# EAGLE board ai_breakout_ft2323RL (EAGLE 6.5.0)
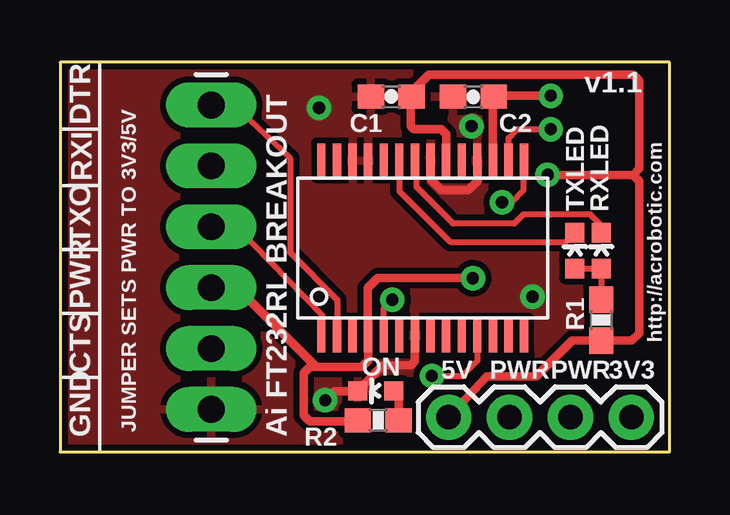
[diagram p0: board, top side]
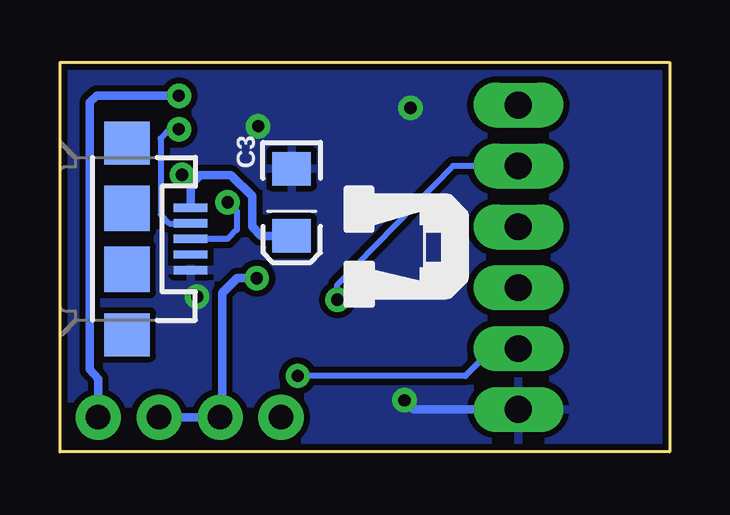
[diagram p1: board, bottom side, seen from below]

Size 25.4 x 16.26 mm. Coordinates in mm from the lower left corner, seen from the top.
Outline: 0,0 25.4,0 25.4,16.26 0,16.26 0,0
Copper layers (1*16): Top 0.035mm / dielectric 1.5mm / Bottom 0.035mm
Design rules "ai_2layer": minimum track width 7mil, minimum drill 15mil, track to track 8mil, track to pad 8mil, pad to pad 8mil, via to via 8mil, smd to smd 8mil, copper to edge 8mil, drill to drill 8mil, minimum pad ring 12mil, minimum via ring 10mil, stop-mask expansion 4mil, vias tented up to drill 20mil, thermal gap 10mil
Net classes: 0 default: width 0.254 mm; 1 power: width 0.356 mm

## Footprints (pad centres in the part's own frame; a part is rotated, then mirrored left to right if it is on the bottom)
CAP-0603 = smd 1.1 x 1: 1 -0.85,0; 2 0.85,0
CAP-POL-EIA3216 = smd 1.4 x 1.6: A 1.4,0; C -1.4,0
SSOP28-LD = smd 0.348 x 1.397: 1 -4.225,-3.656; 2 -3.575,-3.656; 3 -2.925,-3.656; 4 -2.275,-3.656; 5 -1.625,-3.656; 6 -0.975,-3.656; 7 -0.325,-3.656; 8 0.325,-3.656; 9 0.975,-3.656; 10 1.625,-3.656; 11 2.275,-3.656; 12 2.925,-3.656; 13 3.575,-3.656; 14 4.225,-3.656; 15 4.225,3.656; 16 3.575,3.656; 17 2.925,3.656; 18 2.275,3.656; 19 1.625,3.656; 20 0.975,3.656; 21 0.325,3.656; 22 -0.325,3.656; 23 -0.975,3.656; 24 -1.625,3.656; 25 -2.275,3.656; 26 -2.925,3.656; 27 -3.575,3.656; 28 -4.225,3.656
1X06-LONG = drill 1.118 pad 1.88 long: 1 -6.35,0; 2 -3.81,0; 3 -1.27,0; 4 1.27,0; 5 3.81,0; 6 6.35,0
1X04 = drill 1.016 pad 1.88: 1 -3.81,0; 2 -1.27,0; 3 1.27,0; 4 3.81,0
LED-0603 = smd 0.8 x 0.8: A 0,-0.75; C 0,0.75
RES-0603 = smd 1.1 x 1: 1 -0.85,0; 2 0.85,0
USB-MICROB = smd 0.35 x 1.4: D+ 0,2.65; D- -0.65,2.65; GND 1.3,2.65; ID 0.65,2.65; VBUS -1.3,2.65 | smd 1.8 x 1.9: MT1 -4,0; MT2 4,0 | smd 1.9 x 1.9: P$1 -1.27,0; P$2 1.27,0

## Placement (x,y rotation side)
C1  0.1uF  [CAP-0603]  13.8,14.82 180 top
C2  0.1uF  [CAP-0603]  17.22,14.81 180 top
C3  10uF  [CAP-POL-EIA3216]  15.75,10.41 270 bottom
IC1  FT2332RL  [SSOP28-LD]  15.11,8.51 0 top
J1  1X06LONG  [1X06-LONG]  6.3,8.12 90 top
JP1  1X04-PJ  [1X04]  20,1.45 0 top
ON  BLUE  [LED-0603]  13.15,2.55 90 top
R1  300  [RES-0603]  22.55,5.5 270 top
R2  1K  [RES-0603]  13.26,1.32 0 top
RXLED  YELLOW  [LED-0603]  22.55,8.4 0 top
TXLED  YELLOW  [LED-0603]  21.45,8.4 0 top
U$3  AI-LOGOL  [AI-LOGO-L]  11.43,8.51 270 bottom
USB1  USBMICROB  [USB-MICROB]  22.61,8.89 270 bottom

## Library data of the parts
C1-C3 R1 R2 = Ai_Passives
IC1 = Ai_IC
J1 JP1 USB1 = Ai_Connectors
ON RXLED TXLED = Ai_LED
U$3 = Ai_Miscellany

## Nets
3V3 [power]: C2.1 IC1.17 JP1.4
5V [power]: C1.1 C3.A IC1.20 JP1.1 R1.2 USB1.VBUS
CTS: IC1.11 J1.2
DTR: IC1.2 J1.6
GND [power]: C1.2 C2.2 C3.C IC1.7 IC1.18 IC1.21 IC1.25 IC1.26 J1.1 ON.C USB1.GND
N$1: IC1.23 TXLED.C
N$2: IC1.22 RXLED.C
N$3: IC1.16 USB1.D-
N$4: IC1.15 USB1.D+
N$5: ON.A R2.2
N$6: R1.1 RXLED.A TXLED.A
PWR [power]: IC1.4 J1.3 JP1.2 JP1.3 R2.1
RXI: IC1.5 J1.5
TXO: IC1.1 J1.4

## Tracks (layer width: path | path; a pad name or v marks a point on that pad's centre or on a via)
3V3  (via drill 0.51)
  Top 0.356: v20.45,14.86 18.25,14.86 C2.1 18.04,14.85 IC1.17
  Bottom 0.356: JP1.4 23.81,3.06 24.15,3.45 24.15,14.58 23.88,14.86 v20.45,14.86
5V  (via drill 0.51)
  Top 0.356: JP1.1 17.79,3.15 19.85,3.15 21.35,4.65 R1.2 23.83,4.65 24.13,4.95 24.13,11.3 23.88,11.56 | v20.32,11.56 23.88,11.56 | 23.88,11.56 24.13,11.81 24.13,15.49 23.88,15.75 15.37,15.75 14.65,15.03 C1.1 14.61,14.9 14.61,13.59 14.73,13.46 15.88,13.46 16.09,13.25 IC1.20
  Bottom 0.356: v20.32,11.56 19.96,11.19 USB1.VBUS 19.96,11.16 19.56,11.56 18.29,11.56 17.4,10.67 17.4,9.4 17.02,9.02 C3.A
CTS  (via drill 0.51)
  Top 0.254: v15.49,3.17 16.76,3.17 17.4,3.81 17.4,4.59 IC1.11
  Bottom 0.254: J1.2 7.37,4.31 8.51,3.17 v15.49,3.17
DTR
  Top 0.254: J1.6 7.24,14.47 9.59,12.26 9.59,8.32 11.56,6.35 11.56,4.87 IC1.2
GND  (via drill 0.51)
  Top 0.356: IC1.7 14.79,3.79 14.61,3.61 13.46,3.61 ON.C 11.43,2.54 v11.05,2.16 | 13.09,14.81 C1.2 | IC1.21 15.44,11.36 15.88,10.92 17.02,10.92 17.4,11.3 17.4,12.15 IC1.18
  Bottom 0.356: J1.1 10.66,1.77 v11.05,2.16
  other vias: 17.14,13.59 19.68,6.48 10.79,14.35
  pour Bottom (isolate 0.254): 0,0 25.4,0 25.4,16.26 0,16.26
  pour Top (isolate 0.254): 0,0 25.4,0 25.4,16.26 0,16.26
N$1
  Top 0.254: IC1.23 14.14,10.88 16.26,8.76 21.07,8.76 TXLED.C
N$2
  Top 0.254: RXLED.C 22.55,9.45 22.1,9.91 19.3,9.91 18.92,9.53 16.38,9.53 14.86,11.05 14.86,12.09 IC1.22
N$3  (via drill 0.51)
  Top 0.254: v20.45,13.46 19.05,13.46 18.69,13.1 IC1.16
  Bottom 0.254: USB1.D- 20.84,9.54 21.21,9.91 21.21,13.08 20.83,13.46 v20.45,13.46
N$4  (via drill 0.51)
  Top 0.254: IC1.15 19.3,12.13 19.3,10.92 18.8,10.41 v18.41,10.41
  Bottom 0.254: v18.41,10.41 18.03,10.03 18.03,9.27 18.41,8.89 USB1.D+
N$5
  Top 0.254: ON.A 14.11,2.55
  Top 0.356: 14.11,2.55 R2.2
N$6
  Top 0.254: R1.1 RXLED.A TXLED.A
PWR  (via drill 0.51 pad 0.25)
  Top 0.356: 10.67,3.56 7.49,6.73 7.36,6.85 J1.3 | 10.67,3.56 12.57,3.56 12.84,3.82 12.82,3.84 12.84,3.86 IC1.4 12.82,4.87 12.82,6.83 13.24,7.25 v17.2,7.25 | R2.1 12.36,1.27 10.41,1.27 10.16,1.52 10.16,3.3 10.41,3.56 10.67,3.56
  Bottom 0.356: v17.2,7.25 18.02,7.25 18.65,6.63 18.65,1.51 JP1.2 JP1.3
RXI  (via drill 0.51)
  Top 0.254: IC1.5 13.49,6 v13.84,6.35
  Bottom 0.254: J1.5 9.02,11.94 13.84,6.99 v13.84,6.35
TXO
  Top 0.254: J1.4 7.37,9.39 10.92,5.71 10.92,5.01 IC1.1

## Text on the board
tPlace: v1.1 | DTR | RXI | TXO | PWR | http://acrobotic.com | CTS | 5V | PWR | PWR | 3V3 | GND | JUMPER SETS PWR TO 3V3/5V | Ai FT232RL BREAKOUT
_tsilk: Ai FT232RL BREAKOUT | v1.0 | DTR | RXI | R1 | TXLED | TXO | RXLED | R2 | PWR | R3 | CTS | 3V3 | PWR | PWR | 5V | GND | Jumper sets PWR to 3V3/5V | 5V | 3V3
_bsilk: C1 | C2 | /home/xisco/ai_logo.bmp | R4